# Altium PCB Breakout_8pin.PcbDoc
Units mil, origin at the board's own origin, x right, y up, seen from the top; angles counter-clockwise.
Board outline 2165.35 x 984.25 mil, 2 copper layers (Top Layer, Bottom Layer), stack 61.855 mil thick; 7 components, 8 nets, 32 pads, 0 vias.
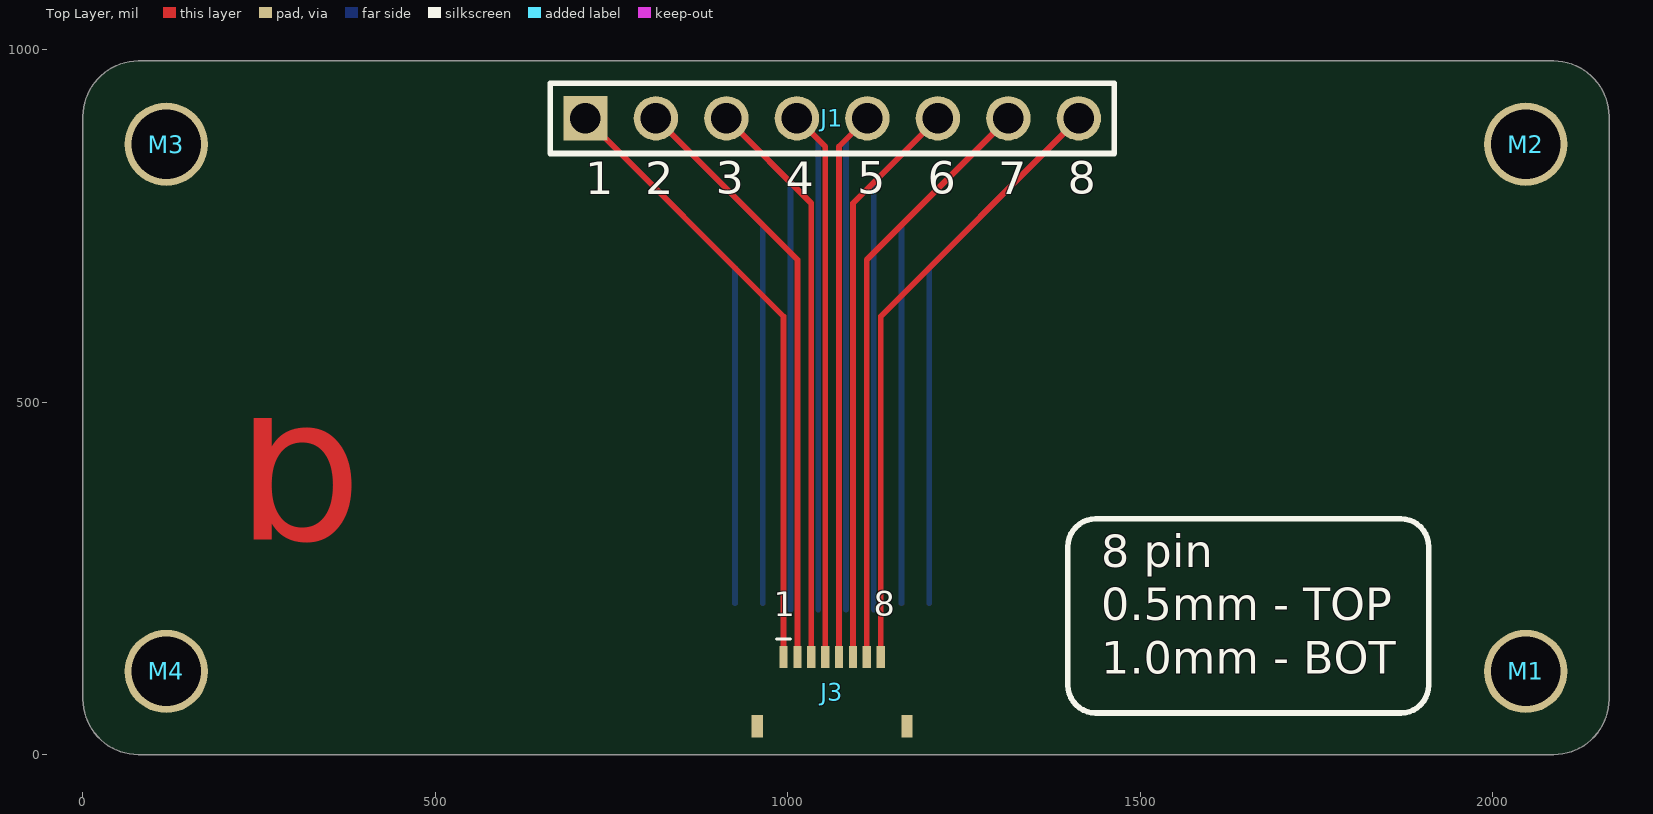
[diagram p0: Top Layer view]
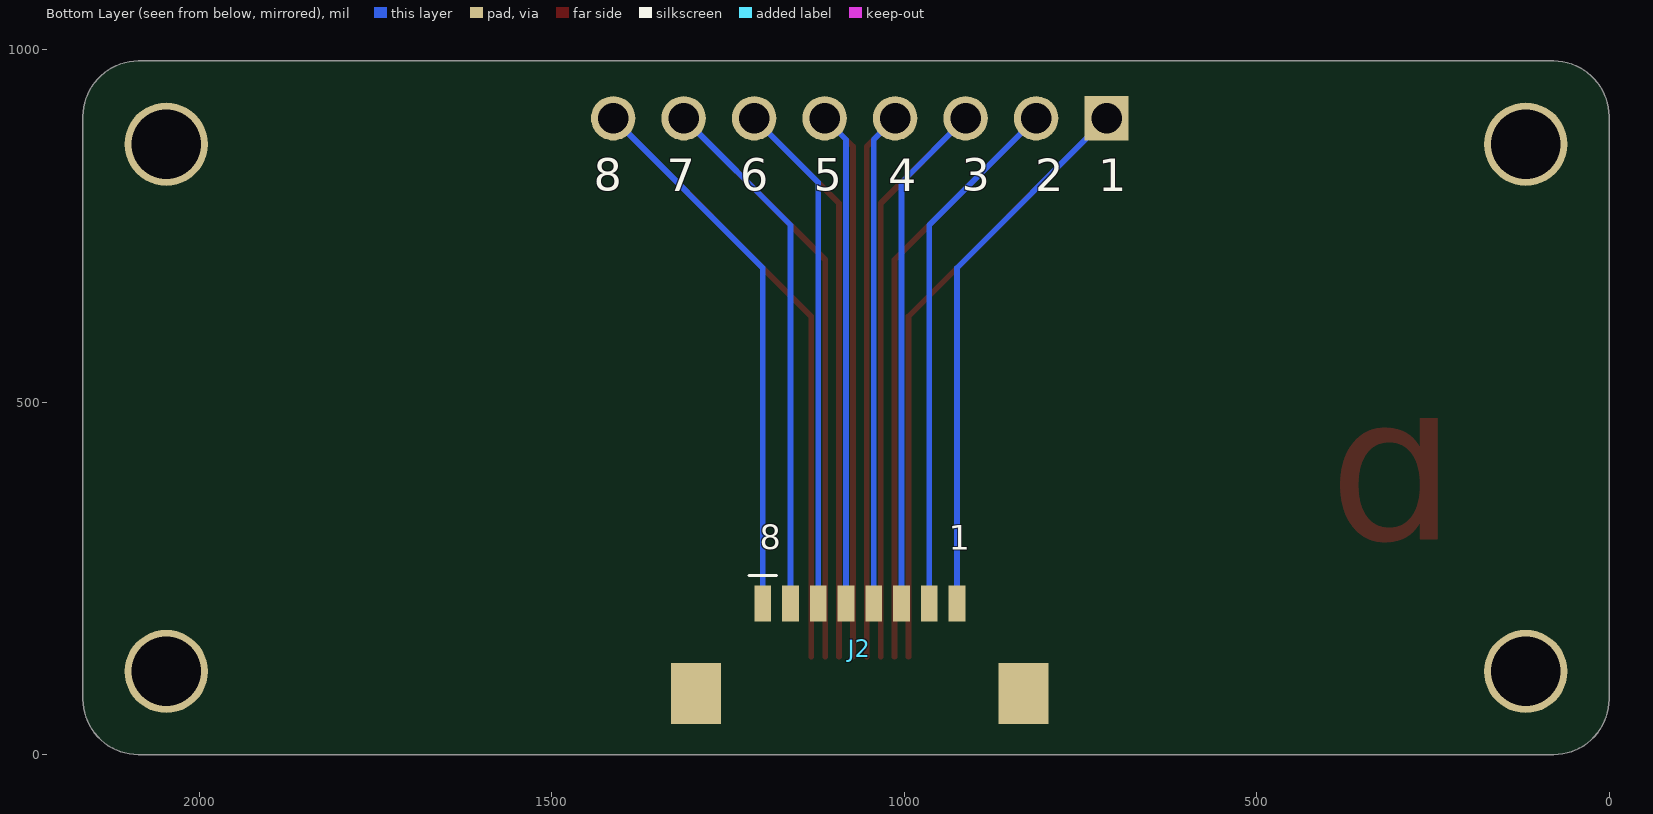
[diagram p1: Bottom Layer view, seen from below]

## Layer stack, top to bottom
Top Solder: solder mask 0.4, Solder Resist, Dk 3.5
Top Layer: signal copper 1.4
Dielectric 1: dielectric 59.0551, FR-4, Dk 4.8
Bottom Layer: signal copper 1.4
Bottom Solder: solder mask 0.4, Solder Resist, Dk 3.5

## Board outline
78.74,0 cw(c78.74,78.74) 0,78.74 0,905.51 cw(c78.74,905.51) 78.74,984.25 2086.61,984.25 cw(c2086.61,905.51) 2165.35,905.51 2165.35,78.74 cw(c2086.61,78.74) 2086.61,0

## Design rules (kind name [scope] priority, off if disabled: settings)
Clearance [All] p1: gap=8.03 ignorepadtopadclearanceinfootprint=TRUE
DiffPairsRouting [All] p1: maxlimit=10 minlimit=2.5 mostfreqgap=5 toplayer_minwidth=7 toplayer_maxwidth=18 toplayer_prefwidth=18 bottomlayer_minwidth=7 bottomlayer_maxwidth=18 bottomlayer_prefwidth=18 impedanceprofiledriven=TRUE maxuncoupledlength=500
HoleSize [All] p1: absolutevalues=TRUE maxlimit=196.85 minlimit=6.02 maxpercent=80.000 minpercent=20.000
MinimumSolderMaskSliver [All] p1: minsoldermaskwidth=7
PolygonConnect [All] p1: connectstyle=Relief reliefconductorwidth=10 reliefentries=4 polygonreliefangle="90 Angle" airgapwidth=10
RoutingVias [All] p1: holewidth=12.01 width=24.02 viastyle="Through Hole" minholewidth=10 minwidth=20 maxholewidth=19.68 maxwidth=50
SolderMaskExpansion [All] p1: expansion=4 istentingtop=FALSE
Width [All] p1: maxlimit=1000 minlimit=8.03 preferedwidth=10 minimp=50.000000 maximp=50.000000 favimp=50.000000
27 further rules are at their usual default settings.

## Components (designator, comment, footprint, x,y, rotation, side; value= is the part's Value field where it differs from the comment)
J1 "61300811121" HDR-V-1X8 1062.99,902.96 r0 top
J2 "XF3M(1)-0815-1B" CONN-FFC-H-8P-1MM 1062.99,150.75 r180 bottom
J3 "FFC2B28-08-G" CONN-FFC-H-8P-0.5MM 1062.99,89.46 r0 top
M1 "MTG_HOLE" MH_P_2.5MM 2047.24,118.11 r90 top
M2 "MTG_HOLE" MH_P_2.5MM 2047.24,866.14 r90 top
M3 "MTG_HOLE" MH_P_2.5MM 118.11,866.14 r90 top
M4 "MTG_HOLE" MH_P_2.5MM 118.11,118.11 r90 top

## Footprints (in the part's own frame and the unit in brackets; to place one, negate y for a bottom-side part, rotate by r counter-clockwise, add the part's x,y. Pads: shape width x height; smd on the part's side, far side on the other; paste and mask are expansions set on the pad)
CONN-FFC-H-8P-0.5MM [mm]
  rect 0.3x0.8 smd: 1(-1.75,1.25) 2(-1.25,1.25) 3(-0.75,1.25) 4(-0.25,1.25) 5(0.25,1.25) 6(0.75,1.25) 7(1.25,1.25) 8(1.75,1.25)
  rect 0.4x0.8 smd: ME1(-2.7,-1.25) ME2(2.7,-1.25)
  silkscreen extent -2,1.9 -1.5,1.9, body extent -3,-1.8 3,1.45, height 1.72
CONN-FFC-H-8P-1MM [mm]
  rect 0.6x1.3 smd: 1(-3.5,1.625) 2(-2.5,1.625) 3(-1.5,1.625) 4(-0.5,1.625) 5(0.5,1.625) 6(1.5,1.625) 7(2.5,1.625) 8(3.5,1.625)
  rect 1.8x2.2 smd: ME1(-5.9,-1.625) ME2(5.9,-1.625)
  silkscreen extent -4,2.63 -3,2.63, body extent -6.3,-3.67 6.3,2.73, height 2
HDR-V-1X8 [mm]
  rect 1.6x1.6 hole 1.1: 1(-8.89,0)
  round 1.6 hole 1.1: 2(-6.35,0) 3(-3.81,0) 4(-1.27,0) 5(1.27,0) 6(3.81,0) 7(6.35,0) 8(8.89,0)
  silkscreen extent -10.16,-1.27 10.16,1.27, body extent -10.16,-1.27 10.16,1.27, height 8.55
MH_P_2.5MM [mm]
  round 3 hole 2.5: 1(0,0)

## Part data
J1: library part HDR-V-1X8-M, "THT Vertical Pin Header WR-PHD, Pitch 2.54 mm, Single Row, 8 pins", Color=Black, Manufacturer 1="Wurth Electronics", Supplier Part Number=20X0963, Category="Headers and Wire Housings", ComponentLink1Description=https://datasheet.octopart.com/61300811121-W%C3%BCrth-Elektronik-datasheet-21154836.pdf?src-supplier=Element14, ComponentLink1URL=https://datasheet.octopart.com/61300811121-W%C3%BCrth-Elektronik-datasheet-21154836.pdf?src-supplier=Element14, ComponentLink2Description=https://katalog.we-online.de/em/datasheet/6130xx11121.pdf?src-supplier=Digi-Key, ComponentLink2URL=https://katalog.we-online.de/em/datasheet/6130xx11121.pdf?src-supplier=Digi-Key, Contact Material=Copper, Contact Mating Length=0.236inch, Contact Plating=Gold, Contact Type="Male Pin", Gender=Male, Manufacturer Part Number 1=61300811121, Mounting Technology="Through Hole", Number of Contacts=8, Number of Positions=8, Number of Rows=1, Packaging=Bulk, Pitch=0.1inch, Pricing="1=0.408, 10=0.343, 25=0.286, 50=0.239, 100=0.216 (USD)", Reach SVHC Compliant=Unknown, RoHS=Yes, RoHS Compliant=Yes, Series=WR-PHD, Stock=1852, Supplier=Newark, Termination=Solder
J2: library part CONN-FFC-H-8P-1MM, "1.0-mm Pitch, Dual Contact ; For FPC/FFC, 8 Contacts, RoHS", Actuator Color=Black, Flammability Rating="UL94 V-0", Housing Color=Natural, Manufacturer 1=Omron, Max Operating Temperature=85°C, Min Operating Temperature=-30°C, Voltage Rating=50V, Actuator Material="Polymer,Liquid Crystal Polymer", Category="FFC / FPC", ComponentLink1Description=https://media.digikey.com/pdf/Data%20Sheets/Omron%20PDFs/XF3M.pdf?src-supplier=Digi-Key, ComponentLink1URL=https://media.digikey.com/pdf/Data%20Sheets/Omron%20PDFs/XF3M.pdf?src-supplier=Digi-Key, ComponentLink2Description=http://datasheet.octopart.com/XF3M%281%29-0815-1B-Omron-datasheet-62282188.pdf?src-supplier=Avnet, ComponentLink2URL=http://datasheet.octopart.com/XF3M%281%29-0815-1B-Omron-datasheet-62282188.pdf?src-supplier=Avnet, ComponentLink3Description=http://datasheet.octopart.com/XF3M%281%29-0815-1B-Omron-datasheet-62282188.pdf?src-supplier=Farnell, ComponentLink3URL=http://datasheet.octopart.com/XF3M%281%29-0815-1B-Omron-datasheet-62282188.pdf?src-supplier=Farnell, ComponentLink4Description=http://datasheet.octopart.com/XF3M%281%29-0815-1B-Omron-datasheet-62282188.pdf?src-supplier=Digi-Key, ComponentLink4URL=http://datasheet.octopart.com/XF3M%281%29-0815-1B-Omron-datasheet-62282188.pdf?src-supplier=Digi-Key, ComponentLink5Description=http://datasheet.octopart.com/XF3M%281%29-0815-1B-Omron-datasheet-62282188.pdf?src-supplier=Newark, ComponentLink5URL=http://datasheet.octopart.com/XF3M%281%29-0815-1B-Omron-datasheet-62282188.pdf?src-supplier=Newark, ComponentLink6Description=http://datasheet.octopart.com/XF3M%281%29-0815-1B-Omron-datasheet-62282188.pdf?src-supplier=Verical, ComponentLink6URL=http://datasheet.octopart.com/XF3M%281%29-0815-1B-Omron-datasheet-62282188.pdf?src-supplier=Verical, ComponentLink7Description=http://datasheet.octopart.com/XF3M%281%29-0815-1B-Omron-datasheet-62282188.pdf?src-supplier=Allied+Electronics, ComponentLink7URL=http://datasheet.octopart.com/XF3M%281%29-0815-1B-Omron-datasheet-62282188.pdf?src-supplier=Allied+Electronics, ComponentLink8Description=http://datasheet.octopart.com/XF3M%281%29-0815-1B-Omron-datasheet-62282188.pdf?src-supplier=Onlinecomponents.com, ComponentLink8URL=http://datasheet.octopart.com/XF3M%281%29-0815-1B-Omron-datasheet-62282188.pdf?src-supplier=Onlinecomponents.com, ComponentLink9Description=http://datasheet.octopart.com/XF3M%281%29-0815-1B-Omron-datasheet-62282188.pdf?src-supplier=Mouser, ComponentLink9URL=http://datasheet.octopart.com/XF3M%281%29-0815-1B-Omron-datasheet-62282188.pdf?src-supplier=Mouser, ComponentLink10Description=http://datasheet.octopart.com/XF3M%281%29-0815-1B-Omron-datasheet-62282188.pdf?src-supplier=TTI, ComponentLink10URL=http://datasheet.octopart.com/XF3M%281%29-0815-1B-Omron-datasheet-62282188.pdf?src-supplier=TTI, ComponentLink11Description=http://datasheet.octopart.com/XF3M%281%29-0815-1B-Omron-datasheet-62282188.pdf?src-supplier=Sager+Electronics, ComponentLink11URL=http://datasheet.octopart.com/XF3M%281%29-0815-1B-Omron-datasheet-62282188.pdf?src-supplier=Sager+Electronics, ComponentLink12Description=http://datasheet.octopart.com/XF3M%281%29-0815-1B-Omron-datasheet-62282188.pdf?src-supplier=Heilind+Electronics, ComponentLink12URL=http://datasheet.octopart.com/XF3M%281%29-0815-1B-Omron-datasheet-62282188.pdf?src-supplier=Heilind+Electronics, ComponentLink13Description=https://datasheet.octopart.com/XF3M%281%29-0815-1B-Omron-datasheet-62282188.pdf?src-supplier=Master+Electronics, ComponentLink13URL=https://datasheet.octopart.com/XF3M%281%29-0815-1B-Omron-datasheet-62282188.pdf?src-supplier=Master+Electronics, Contact Material="Copper Alloy", Contact Plating=Gold, Housing Material=Polymer, Manufacturer Part Number 1=XF3M(1)-0815-1B, Mating Cycles=20, Mounting Technology="Surface Mount", Number of Positions=8, Packaging="Cut Tape", Pins=8, Pricing="1500=0.6639, 3000=0.6476, 7500=0.6309, 10500=0.6071, 15000=0.5967 (USD)", RoHS=Yes, RoHS Compliant=Yes, Series=XF3M, Stock=3000, Supplier="Arrow Electronics", Supplier Part Number=XF3M(1)-0815-1B, Termination=Solder
J3: library part CONN-FFC-H-8P-0.5MM, "FFC & FPC Connectors 08W, 0.5mm FFC Con, R/A, Dual Cont, B/Flp, H1.0mm, Gld, SMT, T&R", Manufacturer 1="Global Connector Technology", Supplier Part Number=1163647, Category=Connectors, Manufacturer Part Number 1=FFC2B28-08-G, Pricing="4000=0.163, 8000=0.159, 12000=0.157, 16000=0.155 (USD)", RoHS=Yes, Stock=8000, Supplier="Future Electronics"
M1 M2 M3 M4: "MTG HOLE PLATED VARIOUS SIZES"

## Nets (pads, with @x,y where several pads share a name; then routed paths per layer and width w, separated by ;. In a path a pad name is that pad's centre, name@x,y a point inside that pad or via, vN(x,y) a via of type N, cw(c..) or ccw(c..) an arc to the next point about the centre after c; other vN are vias at no path point)
NetJ1_1: J1.1 J2.8 J3.1 | length 1656.9
  Top Layer w8.03: J1.1 994.09,621.85 J3.1
  Bottom Layer w8.03: J1.1 925.2,690.75 J2.8
NetJ1_2: J1.2 J2.7 J3.2 | length 1598.5
  Top Layer w8.03: J1.2 1013.78,702.17 J3.2
  Bottom Layer w8.03: J1.2 964.57,751.38 J2.7
NetJ1_3: J1.3 J2.6 J3.3 | length 1548.9
  Top Layer w8.03: J1.3 1033.46,782.48 J3.3
  Bottom Layer w8.03: J1.3 1003.94,812.01 J2.6@1003.94,205.87
NetJ1_4: J1.4 J2.5 J3.4 | length 1490.6
  Top Layer w8.03: J1.4 1053.15,862.8 J3.4
  Bottom Layer w8.03: J1.4 1043.31,872.64 J2.5@1043.31,205.87
NetJ1_5: J1.5 J2.4 J3.5 | length 1490.6
  Top Layer w8.03: J3.5 1072.83,862.8 J1.5
  Bottom Layer w8.03: J2.4@1082.68,205.87 1082.68,872.64 J1.5
NetJ1_6: J1.6 J2.3 J3.6 | length 1548.9
  Top Layer w8.03: J3.6 1092.52,782.48 J1.6
  Bottom Layer w8.03: J2.3@1122.05,205.87 1122.05,812.01 J1.6
NetJ1_7: J1.7 J2.2 J3.7 | length 1598.5
  Top Layer w8.03: J3.7 1112.2,702.17 J1.7
  Bottom Layer w8.03: J2.2 1161.42,751.38 J1.7
NetJ1_8: J1.8 J2.1 J3.8 | length 1656.9
  Top Layer w8.03: J3.8 1131.89,621.85 J1.8
  Bottom Layer w8.03: J2.1 1200.79,690.75 J1.8
pads on no net: J2.ME1 J2.ME2 J3.ME1 J3.ME2 M1.1 M2.1 M3.1 M4.1

## Other copper
Top Layer:
  text "b" at 216.54,192.91 h590.55

## Silkscreen, mask and mechanical layers (free items; w line width, h text height)
Top Overlay:
  lines w7.87: 1397.64,98.43 ccw(c1437.01,98.43) 1437.01,59.06 1870.08,59.06 ccw(c1870.08,98.43) 1909.45,98.43 1909.45,295.28 ccw(c1870.08,295.28) 1870.08,334.65 1437.01,334.65 ccw(c1437.01,295.28) 1397.64,295.28 1397.64,98.43 ; 1397.64,98.43 1397.64,98.43
  text "1" at 712.6,779.53 h78.74
  text "2" at 797.7,779.53 h78.74
  text "3" at 897.57,780.36 h78.74
  text "4" at 997.14,779.53 h78.74
  text "5" at 1098.58,780.36 h78.74
  text "6" at 1198.59,780.36 h78.74
  text "7" at 1298.46,779.53 h78.74
  text "8" at 1397.64,780.36 h78.74
  text "8 pin" at 1444.88,250.24 h78.74
  text "8" at 1122.05,185.67 h59.06
  text "1" at 980.32,185.04 h59.06
  text "0.5mm - TOP" at 1444.88,174.73 h78.74
  text "1.0mm - BOT" at 1444.88,99.26 h78.74
  text "c" at 124.75,-458.4 h1968.5
Bottom Overlay:
  text "3" at 918.38,784.3 h78.74
  text "5" at 1128.39,784.3 h78.74
  text "6" at 1232.9,784.3 h78.74
  text "8" at 1440.94,784.3 h78.74
  text "1" at 724.41,783.46 h78.74
  text "2" at 814.01,783.46 h78.74
  text "4" at 1022.45,783.46 h78.74
  text "7" at 1337.27,783.46 h78.74
  text "1" at 937.01,279.53 h59.06
  text "8" at 1204.72,280.15 h59.06
Board Outline:
  lines w3.94: 1062.99,984.25 1082.68,984.25 ; 0,78.74 ccw(c78.74,78.74) 78.74,0 2086.61,0 ccw(c2086.61,78.74) 2165.35,78.74 2165.35,905.51 ccw(c2086.61,905.51) 2086.61,984.25 78.74,984.25 ccw(c78.74,905.51) 0,905.51 0,78.74